# EAGLE board ROLL IT (EAGLE 9.6.2)
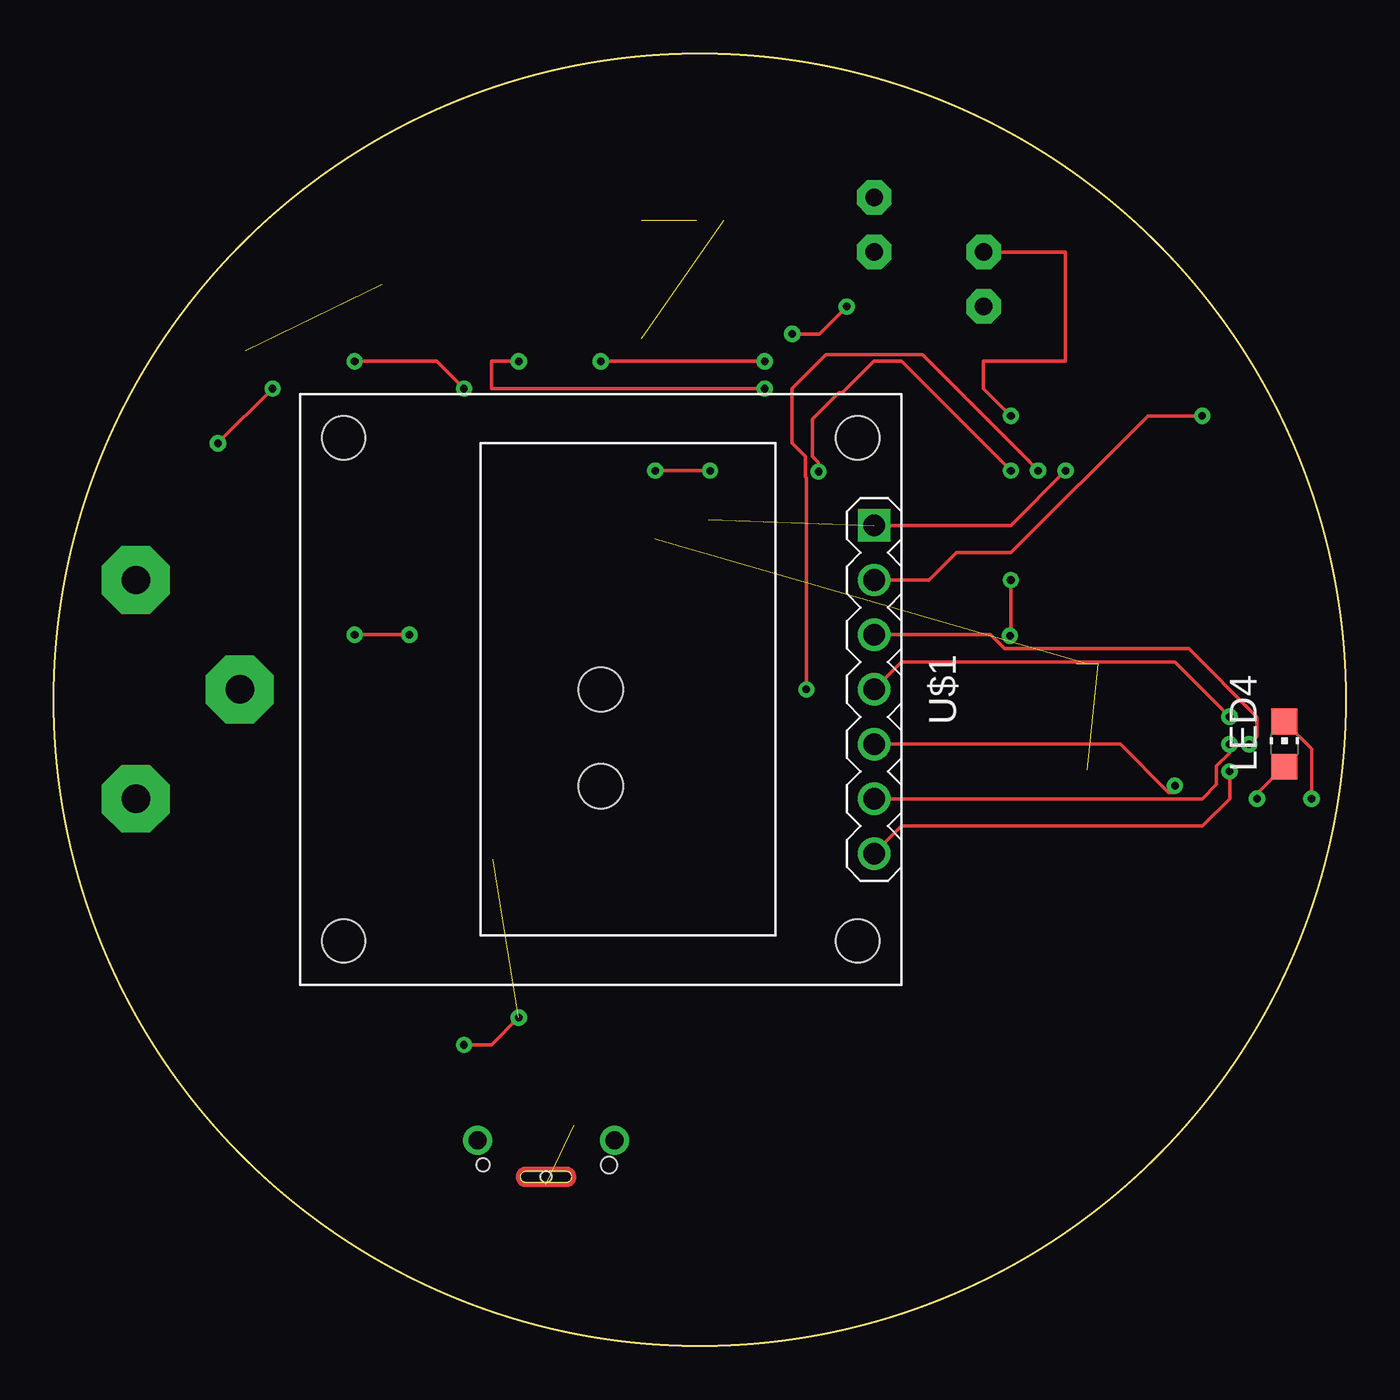
[diagram p0: board, top side]
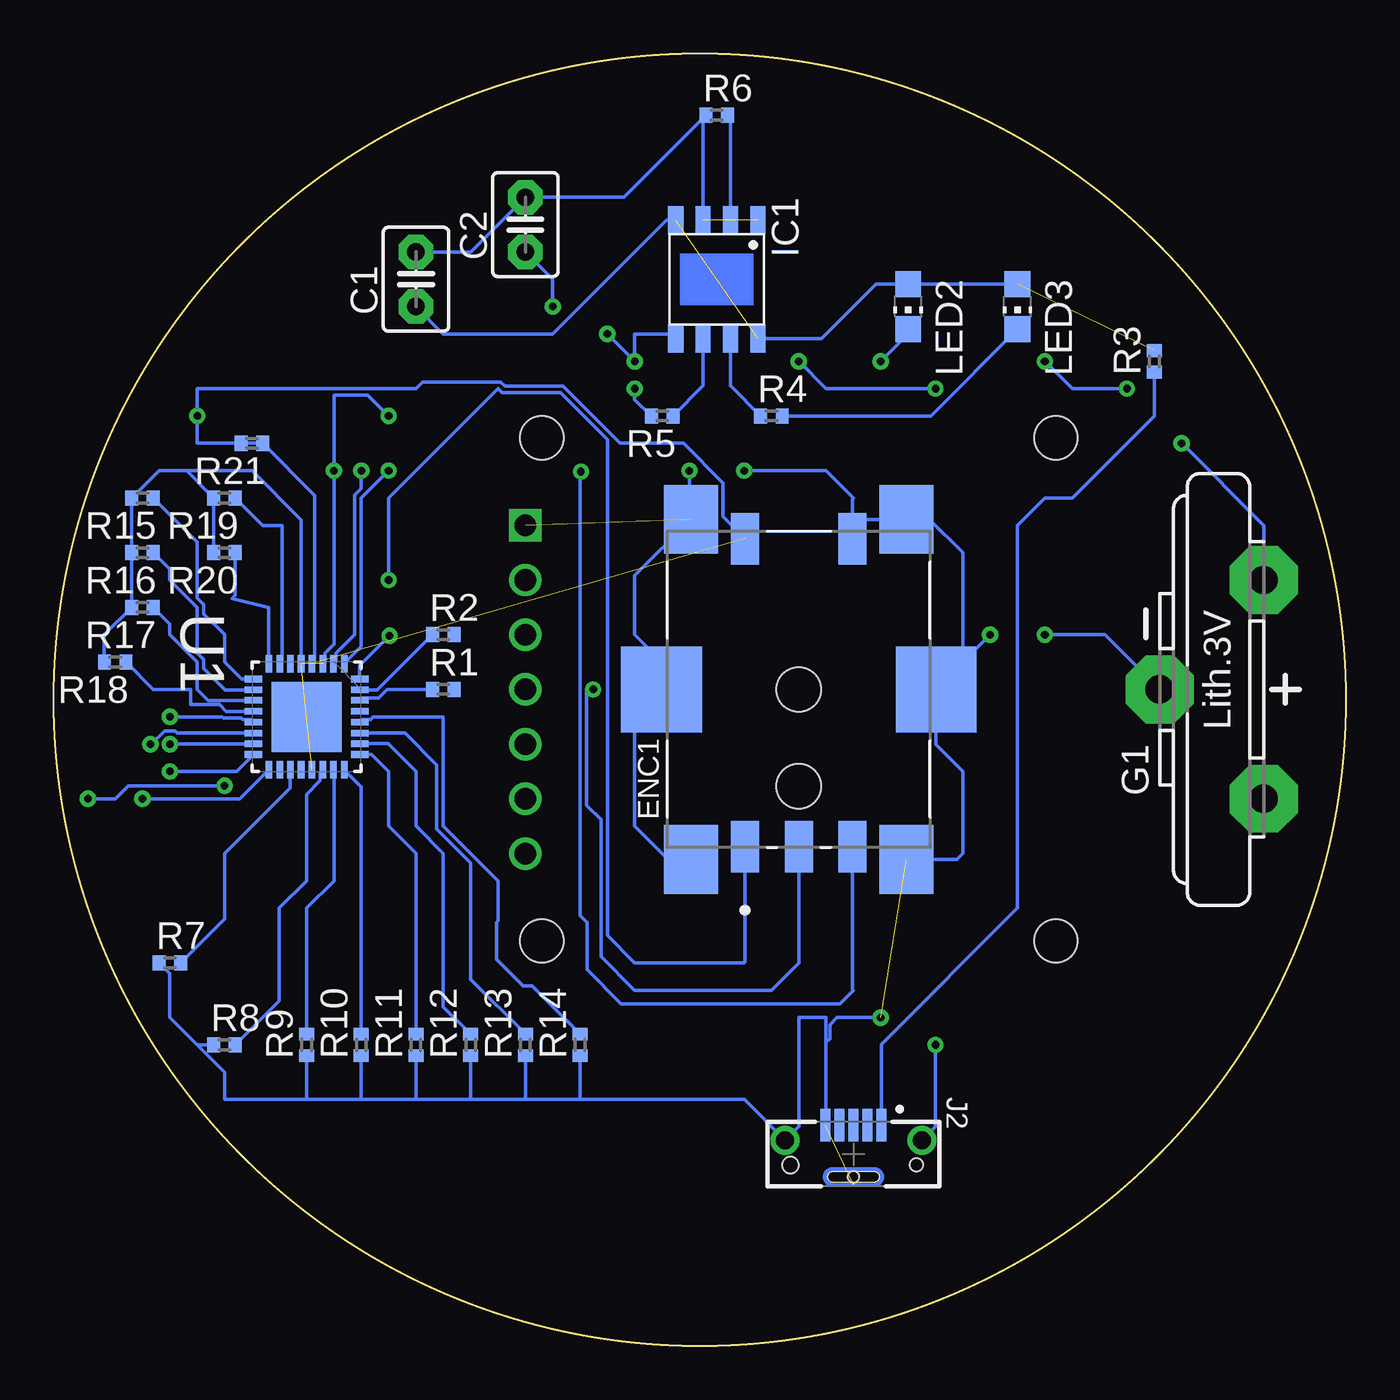
[diagram p1: board, bottom side, seen from below]

Size 60 x 60 mm. Coordinates in mm from the lower left corner, seen from the top.
Outline: circle at 30,30 radius 30
Copper layers (1*16): Top 0.035mm / dielectric 1.5mm / Bottom 0.035mm
Design rules "default": minimum track width 6mil, minimum drill 0.35mm, track to track 6mil, track to pad 6mil, pad to pad 6mil, via to via 6mil, smd to smd 6mil, copper to edge 40mil, drill to drill 6mil, minimum pad ring 10mil, minimum via ring 8mil, stop-mask expansion 4mil, vias tented up to drill 0mil, thermal gap 10mil

## Footprints (pad centres in the part's own frame; a part is rotated, then mirrored left to right if it is on the bottom)
C2.5-3 = drill 0.813 pad 1.6 octagon: 1 -1.27,0; 2 1.27,0
BOURNS_PEC11S-9220K-S0015_0 = smd 2.5 x 3.2: 1 -5,7.9; 2 5,7.9; 5 -5,-7.9; 6 5,-7.9 | smd 3.75 x 4: 3 -6.375,0; 4 6.375,0 | smd 1.3 x 2.4: A -2.5,-7.3; B 2.5,-7.3; C 0,-7.3; D -2.5,7; E 2.5,7 | hole 2.05: 0,0; 0,-4.5
CR2032V = drill 1.321 pad 3.15 octagon: + -2.54,-5.08; +@1 -2.54,5.08; - 2.286,0
SOP-8 = smd 1.3 x 0.7: 1 -2.75,1.905; 2 -2.75,0.635; 3 -2.75,-0.635; 4 -2.75,-1.905; 5 2.75,-1.905; 6 2.75,-0.635; 7 2.75,0.635; 8 2.75,1.905
GCT_USB3160-XX-XXXX-X-X_REVA = smd 0.45 x 1.5: 1 -1.3,-1.35; 2 -0.65,-1.35; 3 0,-1.35; 4 0.65,-1.35; 5 1.3,-1.35 | smd 0.1 x 0.1: 6 0,1.4 | drill 0.85 pad 1.25: 7 3.18,-0.65; 8 -3.18,-0.65 | hole 0.5: 0,1.05 | hole 0.6: -2.925,0.5 | hole 0.75: 2.925,0.5
CHIP-LED0805 = smd 1.2 x 1.2: A 0,-1.05; C 0,1.05
R0402 = smd 0.6 x 0.7: 1 -0.5,0; 2 0.5,0
QFN50P500X500X100-33N = smd 0.813 x 0.305: 1 -2.464,1.753; 2 -2.464,1.245; 3 -2.464,0.762; 4 -2.464,0.254; 5 -2.464,-0.254; 6 -2.464,-0.762; 7 -2.464,-1.245; 8 -2.464,-1.753; 17 2.464,-1.753; 18 2.464,-1.245; 19 2.464,-0.762; 20 2.464,-0.254; 21 2.464,0.254; 22 2.464,0.762; 23 2.464,1.245; 24 2.464,1.753 | smd 0.305 x 0.813: 9 -1.753,-2.464; 10 -1.245,-2.464; 11 -0.762,-2.464; 12 -0.254,-2.464; 13 0.254,-2.464; 14 0.762,-2.464; 15 1.245,-2.464; 16 1.753,-2.464; 25 1.753,2.464; 26 1.245,2.464; 27 0.762,2.464; 28 0.254,2.464; 29 -0.254,2.464; 30 -0.762,2.464; 31 -1.245,2.464; 32 -1.753,2.464 | smd 3.251 x 3.251: 33 0,0
DISPLAY-OLED-128X64 = drill 1 square: 1 -7.62,12.7 | drill 1: 2 -5.08,12.7; 3 -2.54,12.7; 4 0,12.7; 5 2.54,12.7; 6 5.08,12.7; 7 7.62,12.7 | hole 2: -11.684,11.938; 11.684,11.938; 11.684,-11.938; -11.684,-11.938

## Placement (x,y rotation side)
C1  10uF  [C2.5-3]  43.18,49.53 90 bottom
C2  10uF  [C2.5-3]  38.1,52.07 90 bottom
ENC1  BOURNS_PEC11S-9220K-S0015BOURNS_PEC11S-9220K-S0015_0_0  [BOURNS_PEC11S-9220K-S0015_0]  25.4,30.48 0 bottom
G1  CR2032V  [CR2032V]  6.35,30.48 180 bottom
IC1  TP4056  [SOP-8]  29.21,49.53 270 bottom
J2  USB3160-XX-XXXX-X-X_REVA  [GCT_USB3160-XX-XXXX-X-X_REVA]  22.86,8.89 180 bottom
LED2  [CHIP-LED0805]  20.32,48.26 180 bottom
LED3  [CHIP-LED0805]  15.24,48.26 180 bottom
LED4  [CHIP-LED0805]  57.15,27.94 0 top
R1  1k  [R0402]  41.91,30.48 0 bottom
R2  1k  [R0402]  41.91,33.02 0 bottom
R3  0.4  [R0402]  8.89,45.72 90 bottom
R4  1k  [R0402]  26.67,43.18 0 bottom
R5  1k  [R0402]  31.75,43.18 180 bottom
R6  10k  [R0402]  29.21,57.15 0 bottom
R7  100R  [R0402]  54.61,17.78 0 bottom
R8  100R  [R0402]  52.07,13.97 0 bottom
R9  100R  [R0402]  48.26,13.97 90 bottom
R10  100R  [R0402]  45.72,13.97 90 bottom
R11  100R  [R0402]  43.18,13.97 90 bottom
R12  100R  [R0402]  40.64,13.97 90 bottom
R13  100R  [R0402]  38.1,13.97 90 bottom
R14  100R  [R0402]  35.56,13.97 90 bottom
R15  100R  [R0402]  55.88,39.37 180 bottom
R16  100R  [R0402]  55.88,36.83 180 bottom
R17  100R  [R0402]  55.88,34.29 180 bottom
R18  100R  [R0402]  57.15,31.75 180 bottom
R19  100R  [R0402]  52.07,39.37 180 bottom
R20  100R  [R0402]  52.07,36.83 180 bottom
R21  10K  [R0402]  50.8,41.91 180 bottom
U1  ATMEGA328-MU  [QFN50P500X500X100-33N]  48.26,29.21 270 bottom
U$1  DISPLAY-OLED-128X64  [DISPLAY-OLED-128X64]  25.4,30.48 270 top

## Library data of the parts
C1 C2 = capacitor-wima
ENC1 = Bourns - PEC11S-9220K-S0015; CENTROID_NOT_SPECIFIED: No; CONN_ORIENTATION: Vertical; CURRENT_RATING: 10mA; DATASHEET: https://www.bourns.com/docs/Product-Datasheets/PEC11S.pdf; DETEND: Yes; DEVICE_CLASS_L1: Electromechanical; DEVICE_CLASS_L2: Switches; DEVICE_CLASS_L3: Encoders; DIGIKEY_DESCRIPTION: ENC ROTARY ENCODER MECHANICAL 15PPR; DIGIKEY_PART_NUMBER: PEC11S-9220K-S0015-ND; ENCODER_TYPE: Mechanical; HEIGHT: 25.3mm; LEAD_FREE: yes; MF: Bourns; MFG_PACKAGE_IDENT: PEC11S; MFG_PACKAGE_IDENT_DATE: 0; MFG_PACKAGE_IDENT_REV: 0; MOUSER_DESCRIPTION: Mechanical Encoder Rotary Incremental Knurl 1.36oz.in Straight Quadrature Digital Square Wave 15PPR Surface Mount...; MOUSER_PART_NUMBER: 652-PEC11S9220KS0015; MPN: PEC11S-9220K-S0015; PACKAGE: SMT_ENC_11MM7_14MM2; PREFIX: ENC; PULSES_PER_REV: 15; ROHS: yes; TEMPERATURE_RANGE_HIGH: +70°C; TEMPERATURE_RANGE_LOW: -40°C; VERIFICATION_VERSION: 0.0.0.1; VOLTAGE_RATING_DC: 5V
G1 = battery
IC1 = TP4056; AVAILABILITY: Unavailable; DESCRIPTION: Complete single cell Li-Ion battery with a constant current / constant voltage linear charger; MF: NanJing Top Power ASIC Corp.; MP: TP4056; PACKAGE: Package; PRICE: None
J2 = USB3160-XX-XXXX-X-X_REVA; AVAILABILITY: Warning; DESCRIPTION: USB - micro B USB 2.0 Receptacle Connector 5 Position Surface Mount, Through Hole; MF: Global Connector Technology; MP: USB3160-30-0120-0-C; PACKAGE: None; PRICE: None; PURCHASE-URL: https://pricing.snapeda.com/search/part/USB3160-30-0120-0-C/?ref=eda
LED2-LED4 = led
R1-R21 = rcl; SPICEPREFIX: R
U1 = ATMEGA328-MU; AVAILABILITY: Good; DESCRIPTION: AVR AVR® ATmega Microcontroller IC 8-Bit 20MHz 32KB (16K x 16) FLASH 32-VQFN (5x5); MF: Microchip Technology; MP: ATMEGA328-MU; PACKAGE: VQFN-32 Microchip Technology; PRICE: None; PURCHASE-URL: https://pricing.snapeda.com/search/part/ATMEGA328-MU/?ref=eda
U$1 = 128x64 OLED

## Nets
3V3: C2.1 G1.+ IC1.5
+3V3: ENC1.D R21.1 R21.2 U1.4 U1.29 U$1.2
AVCC: U1.18
CHANNEL_A: ENC1.A U1.32
CHANNEL_B: ENC1.B U1.1
GND: C1.2 C2.2 ENC1.1 ENC1.2 ENC1.3 ENC1.4 ENC1.5 ENC1.6 ENC1.E G1.- IC1.1 IC1.3 J2.5 J2.6 J2.7 J2.8 R6.1 R7.1 R8.1 R9.1 R10.1 R11.1 R12.1 R13.1 R14.1 R15.2 R16.2 R17.2 R18.2 R19.2 R20.2 U1.3 U1.5 U1.21 U$1.1
N$1: R7.2 U1.19
N$2: R1.1 U1.30
N$3: R2.1 U1.31
N$4: C1.1 IC1.4 IC1.8 LED2.A LED3.A R3.2
N$5: IC1.6 R5.1
N$6: IC1.2 R6.2
N$7: R8.2 U1.22
N$8: R9.2 U1.23
N$9: LED2.C R5.2
N$10: LED3.C R4.2
N$11: IC1.7 R4.1
N$12: R10.2 U1.24
N$13: R11.2 U1.25
N$14: R12.2 U1.26
N$15: R13.2 U1.27
N$16: R14.2 U1.28
N$17: R15.1 U1.9
N$18: R16.1 U1.10
N$19: R17.1 U1.11
N$20: R18.1 U1.12
N$21: R19.1 U1.7
N$22: R20.1 U1.8
N$23: LED4.A U1.17
OLED_CLK: U1.14 U$1.3
OLED_CS: U1.16 U$1.7
OLED_DC: U1.15 U$1.6
OLED_MOSI: U1.13 U$1.4
OLED_RESET: LED4.C U$1.5
RXD: R1.2
SWITCH: ENC1.C U1.2
TXD: R2.2
VCC: J2.1 R3.1
VCC_2: U1.6

## Tracks (layer width: path | path; a pad name or v marks a point on that pad's centre or on a via)
3V3  (via drill 0.35)
  Top 0.152: v7.62,41.91 v10.16,44.45 | v13.97,45.72 17.78,45.72 v19.05,44.45 | v25.4,45.72 v33.02,45.72 | v36.83,48.26 35.56,46.99 v34.29,46.99
  Bottom 0.152: v7.62,41.91 3.81,38.1 G1.+ | v10.16,44.45 12.7,44.45 v13.97,45.72 | v19.05,44.45 24.13,44.45 v25.4,45.72 | IC1.5 31.32,46.99 33.02,46.99 v33.02,45.72 v34.29,46.99 | C2.1 36.83,49.53 v36.83,48.26
+3V3  (via drill 0.35)  (1 unrouted)
  Top 0.152: U$1.2 40.64,35.56 41.91,36.83 44.45,36.83 50.8,43.18 v53.34,43.18
  Bottom 0.152: U1.4 47.88,31.8 47.88,39.49 R21.1 R21.2 53.34,41.91 v53.34,43.18 53.34,44.45 43.18,44.45 42.88,44.76 39.24,44.76 39.05,44.56 36.34,44.56 33.69,41.91 30.76,41.91 28.92,40.08 28.92,38.5 ENC1.D
CHANNEL_A  (via drill 0.35)
  Top 0.152: v44.45,35.56 44.45,33.02 v44.41,32.98
  Bottom 0.152: ENC1.A 27.9,17.82 27.94,17.78 33.02,17.78 34.29,19.05 34.29,42.08 36.47,44.26 39.18,44.26 39.37,44.45 44.45,39.37 v44.45,35.56 | v44.41,32.98 45.8,31.59 U1.32
CHANNEL_B  (via drill 0.35)
  Top 0.152: v35.52,40.6 35.52,41.02 35.25,41.3 35.25,43.03 36.47,44.26 36.64,44.26 38.1,45.72 39.37,45.72 v44.45,40.64
  Bottom 0.152: ENC1.B 22.9,16.55 22.86,16.51 23.5,15.88 33.66,15.88 35.25,17.47 35.25,19.66 35.56,19.98 35.56,40.64 v35.52,40.6 | v44.45,40.64 45.72,39.37 45.72,32.46 U1.1
GND  (via drill 0.35)  (6 unrouted)
  Top 0.152: v13.97,33.02 v16.51,33.02 | v21.59,15.24 20.32,13.97 v19.05,13.97 | U$1.1 44.45,38.1 v46.99,40.64 | v44.45,43.18 43.18,44.45 43.18,45.72 46.99,45.72 46.99,50.8 C1.2 | v27.94,40.64 v30.48,40.64
  Bottom 0.152: IC1.3 29.84,57.02 R6.1 33.52,53.34 C2.2 40.64,50.8 C1.2 | R18.2 57.65,33.02 R17.2 R16.2 R15.2 55.11,40.64 53.84,40.64 | 53.84,40.64 R19.2 R20.2 | U1.5 48.51,38.35 50.8,40.64 53.84,40.64 | R14.1 35.56,11.43 | 35.56,11.43 38.1,11.43 | 38.1,11.43 R13.1 | R12.1 40.64,11.43 | 40.64,11.43 38.1,11.43 | R11.1 43.18,11.43 | 43.18,11.43 40.64,11.43 | R10.1 45.72,11.43 | 45.72,11.43 43.18,11.43 | R9.1 48.26,11.43 | 48.26,11.43 45.72,11.43 | R7.1 54.61,17.28 54.61,15.24 53.34,13.97 | 53.34,13.97 R8.1 | 53.34,13.97 52.07,12.7 52.07,11.43 48.26,11.43 | 35.56,11.43 27.93,11.43 J2.7 25.4,10.18 25.4,15.24 24.13,15.24 24.13,14.08 | v13.97,33.02 11.18,33.02 G1.- | v16.51,33.02 19.02,30.5 ENC1.4 | ENC1.4 17.78,31.73 17.78,36.83 19.33,38.38 ENC1.2 22.58,38.38 22.9,38.06 ENC1.E 22.9,39.33 22.86,39.37 24.13,40.64 v27.94,40.64 | ENC1.4 19.02,27.91 17.78,26.67 17.78,22.86 18.06,22.58 ENC1.6 | ENC1.5 31.47,22.58 33.02,24.13 33.02,29.23 ENC1.3 31.75,30.48 31.75,31.75 33.02,33.02 33.02,35.76 30.48,38.3 | ENC1.1 30.48,38.3 | 24.13,14.08 24.13,10.27 J2.5 | J2.8 19.05,10.17 v19.05,13.97 | 24.13,14.08 23.96,14.25 23.96,14.89 23.62,15.24 v21.59,15.24 | U1.3 47.4,31.77 47.4,32.17 46.99,32.58 v46.99,40.64 46.99,44.15 45.41,44.15 v44.45,43.18 | v30.48,40.64 30.48,38.3
N$1
  Bottom 0.152: R7.2 52.07,19.82 52.07,22.86 49.02,25.91 U1.19
N$2
  Bottom 0.152: R1.1 44.52,30.48 44.92,30.07 45.7,30.07 U1.30
N$3
  Bottom 0.152: R2.1 44.98,30.45 U1.31
N$4  (2 unrouted)
  Bottom 0.152: IC1.8 24.34,46.78 21.81,49.31 LED2.A LED3.A | IC1.4 31.54,52.28 36.83,46.99 41.91,46.99 C1.1
N$5
  Bottom 0.152: IC1.6 29.84,44.59 R5.1
N$6
  Bottom 0.152: IC1.2 28.57,57.02 R6.2
N$7
  Bottom 0.152: R8.2 49.53,16.01 49.53,20.32 48.26,21.59 48.26,25.61 47.62,26.25 47.62,26.62 U1.22
N$8
  Bottom 0.152: U1.23 46.99,26.72 46.99,21.59 48.26,20.32 R9.2
N$9  (via drill 0.35)
  Top 0.152: v33.02,44.45 20.32,44.45 20.32,45.72 v21.59,45.72
  Bottom 0.152: R5.2 33.02,43.95 v33.02,44.45 | v21.59,45.72 20.32,46.99 LED2.C
N$10
  Bottom 0.152: LED3.C 19.27,43.18 R4.2
N$11
  Bottom 0.152: IC1.7 28.57,44.59 R4.1
N$12
  Bottom 0.152: U1.24 45.72,25.96 R10.2
N$13
  Bottom 0.152: U1.25 45.24,27.46 44.45,26.67 44.45,24.13 43.18,22.86 R11.2
N$14
  Bottom 0.152: R12.2 41.91,15.74 41.91,22.86 43.18,24.13 43.18,26.67 44.48,27.96 U1.26
N$15
  Bottom 0.152: R13.2 40.64,17.01 40.64,22.43 42.22,24 42.22,26.98 43.69,28.45 U1.27
N$16
  Bottom 0.152: R14.2 37.79,16.7 38.2,16.7 39.43,17.93 39.43,19.66 39.37,19.72 39.37,21.59 41.91,24.13 41.91,29.21 45.17,29.21 45.3,29.08 45.67,29.08 U1.28
N$17
  Bottom 0.152: R15.1 53.34,37.33 53.34,34.72 53.03,34.42 53.03,33.98 52.07,33.02 52.07,31.75 51.28,30.96 U1.9
N$18
  Bottom 0.152: R16.1 54.61,36.06 54.61,35.56 53.34,34.29 53.34,32.18 53.03,31.88 53.03,31.45 52.05,30.45 U1.10
N$19
  Bottom 0.152: R17.1 54.61,33.52 54.61,33.02 53.34,31.75 53.34,30.48 52.83,29.97 U1.11
N$20
  Bottom 0.152: R18.1 55.38,30.48 53.65,30.48 53.65,29.77 52.3,29.77 51.99,29.46 U1.12
N$21
  Bottom 0.152: R19.1 50.3,38.1 49.4,38.1 49.4,31.88 49.53,31.75 49.53,31.7 U1.7
N$22
  Bottom 0.152: R20.1 51.57,34.87 51.71,34.7 50.01,34.29 U1.8
N$23  (via drill 0.35)
  Top 0.152: v55.88,25.4 55.88,25.62 LED4.A
  Bottom 0.152: U1.17 51.36,25.4 v55.88,25.4
OLED_CLK  (via drill 0.35)
  Top 0.152: U$1.3 43.5,33.02 44.16,32.37 52.72,32.37 55.88,29.21 55.88,28.3 v55.52,27.94
  Bottom 0.152: v55.52,27.94 55.47,27.94 54.86,28.55 54.36,28.55 54.26,28.45 U1.14
OLED_CS  (via drill 0.35)
  Top 0.152: U$1.7 39.37,24.13 53.34,24.13 54.61,25.4 v54.61,26.67
  Bottom 0.152: v54.61,26.67 51.51,26.67 U1.16
OLED_DC  (via drill 0.35)
  Top 0.152: U$1.6 53.34,25.4 54,26.06 54,26.92 54.61,27.53 v54.61,27.94
  Bottom 0.152: v54.61,27.94 50.75,27.94 U1.15
OLED_MOSI  (via drill 0.35)
  Top 0.152: U$1.4 39.37,31.75 52.07,31.75 v54.61,29.21
  Bottom 0.152: v54.61,29.21 52.17,29.21 52.12,29.16 51.3,29.16 51.23,29.08 50.85,29.08 U1.13
OLED_RESET  (via drill 0.35)
  Top 0.152: U$1.5 49.53,27.94 51.77,25.7 52.07,25.7 v52.07,26.01 | v58.42,25.4 58.42,27.72 LED4.C
  Bottom 0.152: v52.07,26.01 56.54,26.01 57.15,25.4 v58.42,25.4
SWITCH  (via drill 0.35)
  Top 0.152: v34.95,30.48 34.95,40.3 34.91,40.35 34.91,41.29 34.29,41.91 34.29,44.45 35.87,46.02 40.34,46.02 v45.72,40.64
  Bottom 0.152: ENC1.C 25.4,17.78 26.67,16.51 33.02,16.51 34.59,18.09 34.59,24.43 35.26,25.09 35.26,30.48 v34.95,30.48 | v45.72,40.64 45.72,39.8 46.02,39.5 46.02,33.04 46.89,32.17 46.89,31.8 U1.2
VCC
  Bottom 0.152: R3.1 8.89,43.18 12.7,39.37 13.97,39.37 15.24,38.1 15.24,20.32 21.56,14 J2.1